# Altium PCB project.PcbDoc
Units mil, origin at the board's own origin, x right, y up, seen from the top; angles counter-clockwise.
Board outline 2319.86 x 2319.86 mil, 2 copper layers (Top Layer, Bottom Layer); 78 components, 50 nets, 256 pads, 0 vias.
Unrouted connection lines stored in the file: 1.
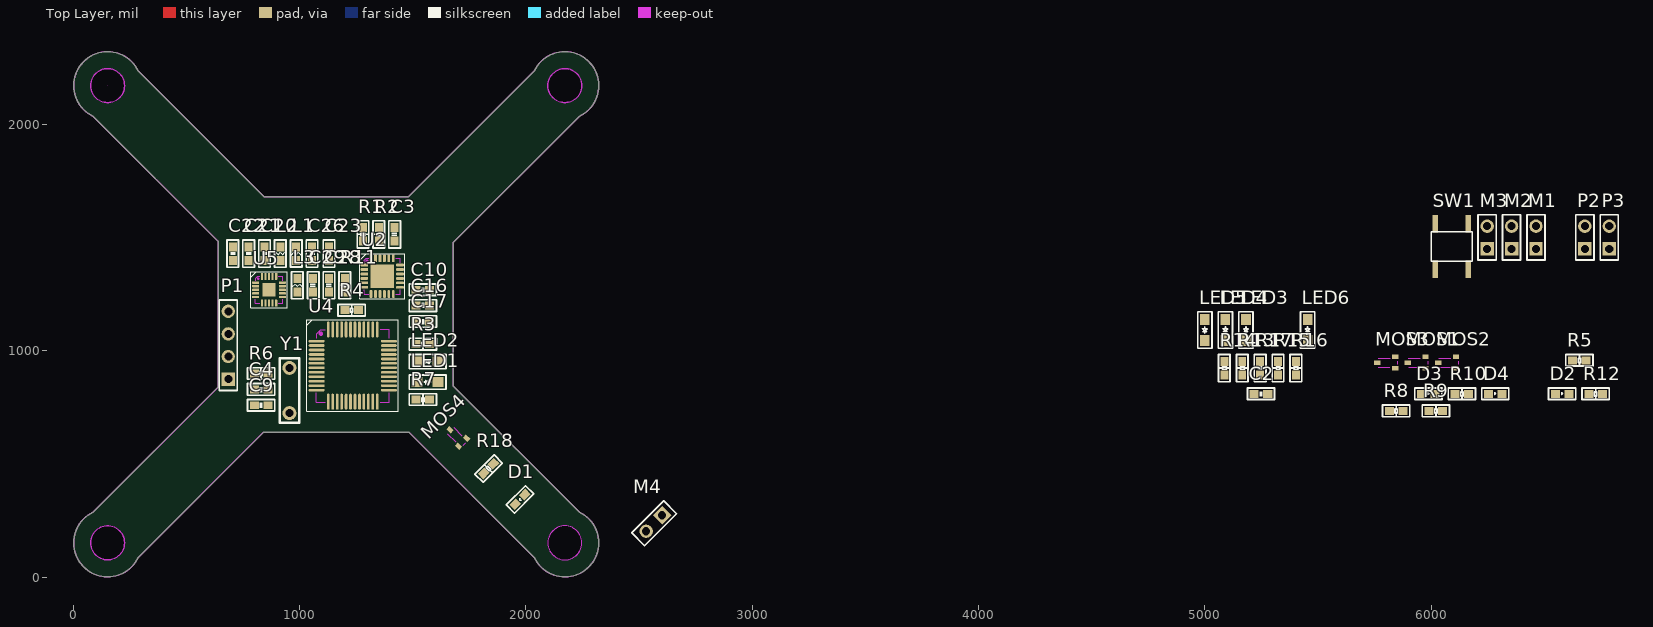
[diagram p0: Top Layer view]
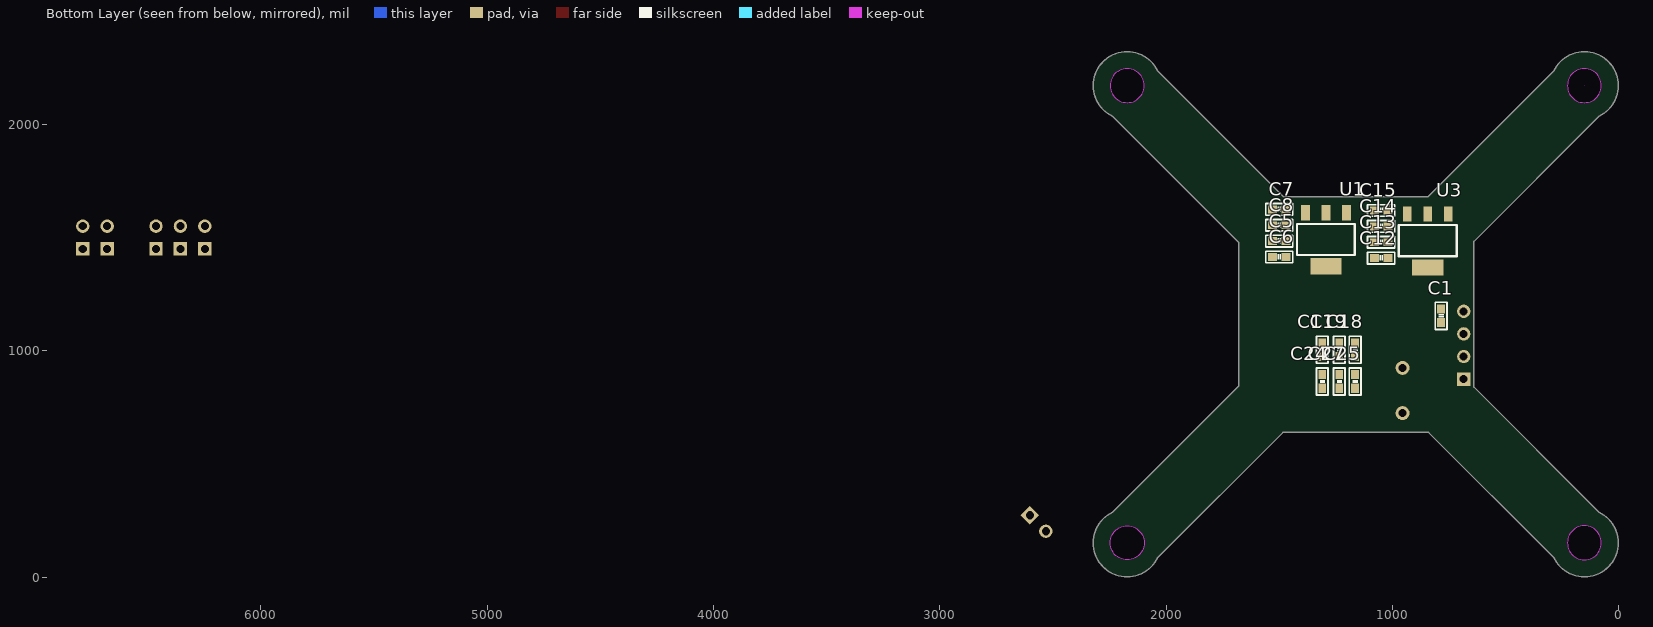
[diagram p1: Bottom Layer view, seen from below]

## Layer stack, top to bottom
Top Solder: solder mask 0.4, Solder Resist, Dk 3.5
Top Layer: signal copper 1.4
Dielectric 1: dielectric 12.6, FR-4, Dk 4.8
Bottom Layer: signal copper 1.4
Bottom Solder: solder mask 0.4, Solder Resist, Dk 3.5

## Board outline
287.32,87.32 cw(c151.97,151.97) 87.32,287.32 86.97,286.97 640,840 640,1483.94 86.97,2036.97 87.32,2036.61 cw(c151.97,2171.97) 287.32,2236.61 286.97,2236.97 843.94,1680 1480,1680 2036.97,2236.97 2036.61,2236.61 cw(c2171.97,2171.97) 2236.61,2036.61 2236.97,2036.97 1680,1480 1680,843.94 2236.97,286.97 2236.61,287.32 cw(c2171.97,151.97) 2036.61,87.32 2036.97,86.97 1483.94,640 840,640
cut-out: 2171.97,2096.97 cw(c2171.97,2171.97) 2096.97,2171.97 cw(c2171.97,2171.97) 2171.97,2246.97 cw(c2171.97,2171.97) 2246.97,2171.97 cw(c2171.97,2171.97)
cut-out: 2096.97,151.97 ccw(c2171.97,151.97) 2171.97,76.97 ccw(c2171.97,151.97) 2246.97,151.97 ccw(c2171.97,151.97) 2171.97,226.97 ccw(c2171.97,151.97)
cut-out: 76.97,151.97 cw(c151.97,151.97) 151.97,226.97 cw(c151.97,151.97) 226.97,151.97 cw(c151.97,151.97) 151.97,76.97 cw(c151.97,151.97)
cut-out: 151.97,2096.97 cw(c151.97,2171.97) 76.97,2171.97 cw(c151.97,2171.97) 151.97,2246.97 cw(c151.97,2171.97) 226.97,2171.97 cw(c151.97,2171.97)
cut-out: 151.97,2171.97

## Design rules (kind name [scope] priority, off if disabled: settings)
Clearance [All] p1: gap=1 ignorepadtopadclearanceinfootprint=FALSE except(0: Arc-Hole Track-Hole SMDPad-Hole THPad-Hole Via-Hole Fill-Hole Poly-Hole Region-Hole Text-Hole)
ComponentClearance [All] p1: gap=10 collisioncheckmode=3 verticalgap=100000 showdistances=FALSE
PolygonConnect [All] p1: connectstyle=Relief reliefconductorwidth=10 reliefentries=4 polygonreliefangle="90 Angle" airgapwidth=10
RoutingVias [All] p1: holewidth=28 width=50 viastyle="Through Hole" minholewidth=28 minwidth=50 maxholewidth=28 maxwidth=50
SolderMaskExpansion [All] p1: expansion=4
Width [All] p1: maxlimit=10 minlimit=10 preferedwidth=10
29 further rules are at their usual default settings.

## Components (designator, comment, footprint, x,y, rotation, side; value= is the part's Value field where it differs from the comment)
C1 "104" C0603 785,1155 r90 bottom
C2 "105" C0603 5247.56,810.37 r0 top value=104
C3 "2.2n" C0603 1420,1515 r270 top value=104
C4 "20p" C0603 830,830 r0 top value=104
C5 "22u" C0603 1500,1485 r0 bottom
C6 "100n" C0603 1500,1415 r0 bottom
C7 "10u" C0603 1500,1625 r0 bottom
C8 "100n" C0603 1500,1555 r0 bottom
C9 "20p" C0603 830,760 r0 top value=104
C10 "104" C0603 1545,1270 r0 top
C11 "0.1U" C0603 1310,1005 r270 bottom value=104
C12 "22u" C0603 1049.92,1410 r0 bottom
C13 "100n" C0603 1049.92,1480 r0 bottom
C14 "10u" C0603 1049.92,1550 r0 bottom
C15 "100n" C0603 1049.92,1620 r0 bottom
C16 "0.1u" C0603 1545,1200 r180 top value=104
C17 "104" C0603 1545,1130 r0 top
C18 "0.1u" C0603 1165,1005 r90 bottom value=104
C19 "0.1u" C0603 1235,1005 r90 bottom value=104
C20 "33n" C0603 845,1430 r90 top value=104
C21 "10n" C0603 775,1430 r90 top value=104
C22 "1n" C0603 705,1430 r90 top value=104
C23 "1p" C0603 1130,1430 r90 top value=104
C24 "0.1u" C0603 1310,865 r90 bottom value=104
C25 "10u" C0603 1165,865 r90 bottom value=104
C26 "1.5p" C0603 1055,1430 r90 top value=104
C27 "0.1u" C0603 1235,865 r90 bottom value=104
C28 "2.2n" C0603 1130,1290 r270 top value=104
C29 "4.7p" C0603 1060,1290 r270 top value=104
D1 "SS14" D0603 1970.25,354.39 r225 top
D2 "SS14" D0603 6573.57,800.37 r0 top
D3 "SS14" D0603 5982.08,800.37 r0 top
D4 "SS14" D0603 6277.83,800.37 r0 top
L1 "3.9n" L0603 -2660,-7560 r270 top
L2 "8.2n" L0603 4560,10420 r90 top
L3 "2.7n" L0603 -2655,-7700 r270 top
LED1 "LED" LED 1565.64,862.17 r0 top
LED2 "LED" LED 1565.64,953.03 r0 top
LED3 "LED" LED 5181.1,1092.42 r90 top
LED4 "LED" LED 5090.24,1092.42 r90 top
LED5 "LED" LED 4999.37,1092.42 r90 top
LED6 "LED" LED 5453.7,1092.42 r90 top
M1 "TL" HDR-1X2 6457.68,1501.06 r90 top
M2 "TR" HDR-1X2 6349.8,1501.06 r90 top
M3 "BL" HDR-1X2 6241.93,1501.06 r90 top
M4 "BR" HDR-1X2 2570,235 r225 top
MOS1 "AO3400" SOT-23 5933.35,947.34 r90 top
MOS2 "AO3400" SOT-23 6067.65,947.34 r90 top
MOS3 "AO3400" SOT-23 5799.05,947.34 r90 top
MOS4 "AO3400" SOT-23 1690,625 r45 top
P1 "SWD" HDR1X4 685,875 r90 top
P2 "Header-1X2" HDR-1X2 6673.43,1501.06 r90 top
P3 "Header-1X2" HDR-1X2 6781.3,1501.06 r90 top
R1 "10K" R0603 1280,1515 r90 top
R2 "10K" R0603 1350,1515 r90 top
R3 "510R" R0603 1545,1030 r0 top
R4 "10K" R0603 1229.92,1180 r0 top
R5 "10K,0603" R0603 6654.43,958.24 r0 top
R6 "1M" R0603 830,900 r180 top
R7 "510R" R0603 1545,785 r0 top
R8 "10K" R0603 5845,735 r0 top
R9 "10K" R0603 6020,735 r0 top
R10 "10K" R0603 6134.87,810.37 r0 top
R11 "22k" R0603 1200,1290 r270 top
R12 "10K" R0603 6726.37,810.37 r0 top
R13 "10K" R0603 5164.8,923.9 r90 top
R14 "10K" R0603 5085.75,923.9 r90 top
R15 "10K" R0603 5322.91,923.9 r90 top
R16 "10K" R0603 5401.97,923.9 r90 top
R17 "10K" R0603 5243.86,923.9 r90 top
R18 "10K" R0603 1835,480 r225 top
SW1 "SW-PB_V" KEY-SMT 6089.99,1461.24 r90 top
U1 "AMS1117-5" SOT-223-L 1295,1490 r0 bottom
U2 "MPU6050" QFN-24-4X4-L 1365,1330 r0 top
U3 "AMS1117-3.3" SOT-223-L 845,1485 r0 bottom
U4 "STM32F103C8T6" LQFP-48-5X5 1235,935 r0 top
U5 "nRF24L01" QFN-20-3X3-L 865,1270 r0 top
Y1 "16MHz" XTAL1 955,725 r90 top

## Footprints (in the part's own frame and the unit in brackets; to place one, negate y for a bottom-side part, rotate by r counter-clockwise, add the part's x,y. Pads: shape width x height; smd on the part's side, far side on the other; paste and mask are expansions set on the pad)
C0603 [mil]
  rect 40x35 smd: 1(-29.92,0) 2(29.92,0)
  silkscreen extent -60,-26 60,26
D0603 [mil]
  rect 40x35 smd: 1(-25,10) 2(34.84,10)
  silkscreen extent -55,-16 65,36
HDR1X4 [mm] "Connector; Header; 4 Position; Right Angle"
  rect 1.5x1.5 hole 0.9: 1(0,0)
  round 1.5 hole 0.9: 2(2.54,0) 3(5.08,0) 4(7.62,0)
  silkscreen extent -1.27,-1.02 8.89,1.02
HDR-1X2 [mm]
  rect 1.5x1.5 hole 0.9: 1(-1.27,-0.127)
  round 1.5 hole 0.9: 2(1.27,-0.127)
  silkscreen extent -2.54,-1.14 2.54,0.89
KEY-SMT [mm]
  rect 2x0.6 smd: 1(-2.55,-1.85) 1(2.55,-1.87) 2(-2.55,1.85) 2(2.55,1.85)
  silkscreen extent -1.65,-2.29 1.65,2.29
L0603 [mil]
  rect 40x35 smd: 1(-9020,3645) 2(-8960.16,3645)
  silkscreen extent -9050,3619 -8930,3671
LED [mil]
  rect 49x43 smd: 1(46.26,0) 2(-46.26,0)
  silkscreen extent -81,-31 81,31
LQFP-48-5X5 [mm]
  oval 1.8x0.3 smd: 1(-4.05,2.75) 2(-4.05,2.25) 3(-4.05,1.75) 4(-4.05,1.25) 5(-4.05,0.75) 6(-4.05,0.25) 7(-4.05,-0.25) 8(-4.05,-0.75) 9(-4.05,-1.25) 10(-4.05,-1.75) 11(-4.05,-2.25) 12(-4.05,-2.75) 25(4.05,-2.75) 26(4.05,-2.25) 27(4.05,-1.75) 28(4.05,-1.25) 29(4.05,-0.75) 30(4.05,-0.25) 31(4.05,0.25) 32(4.05,0.75) 33(4.05,1.25) 34(4.05,1.75) 35(4.05,2.25) 36(4.05,2.75)
  oval 0.3x1.8 smd: 13(-2.75,-4.05) 14(-2.25,-4.05) 15(-1.75,-4.05) 16(-1.25,-4.05) 17(-0.75,-4.05) 18(-0.25,-4.05) 19(0.25,-4.05) 20(0.75,-4.05) 21(1.25,-4.05) 22(1.75,-4.05) 23(2.25,-4.05) 24(2.75,-4.05) 37(2.75,4.05) 38(2.25,4.05) 39(1.75,4.05) 40(1.25,4.05) 41(0.75,4.05) 42(0.25,4.05) 43(-0.25,4.05) 44(-0.75,4.05) 45(-1.25,4.05) 46(-1.75,4.05) 47(-2.25,4.05) 48(-2.75,4.05)
  Top Layer keep-out circle w0.254: c-3.581,3.581 r0.114
  Top Layer keep-out lines w0.1: -4.089,-3.073 -4.089,-4.089 -3.073,-4.089 ; -4.064,3.073 -4.064,3.556 -3.581,4.039 -3.34,4.039 -3.061,4.039 ; 3.073,-4.089 4.089,-4.089 4.089,-3.073 ; 3.073,4.089 4.089,4.089 4.089,3.073
  silkscreen extent -5.18,-5.13 5.13,5.13
QFN-20-3X3-L [mm]
  rrect50% 0.8x0.25 smd mask+0.064: 1(-1.5,0.8) 2(-1.5,0.4) 3(-1.5,0) 4(-1.5,-0.4) 5(-1.5,-0.8) 11(1.5,-0.8) 12(1.5,-0.4) 13(1.5,0) 14(1.5,0.4) 15(1.5,0.8)
  rrect50% 0.25x0.8 smd mask+0.064: 6(-0.8,-1.5) 7(-0.4,-1.5) 8(0,-1.5) 9(0.4,-1.5) 10(0.8,-1.5) 16(0.8,1.5) 17(0.4,1.5) 18(0,1.5) 19(-0.4,1.5) 20(-0.8,1.5)
  rect 1.5x1.5 smd: 21(0,0)
  Top Layer keep-out lines w0.1: -1.524,-1.041 -1.524,-1.524 -1.041,-1.524 ; -1.499,1.041 -1.499,1.283 -1.257,1.524 -1.041,1.524 ; 1.041,-1.524 1.524,-1.524 1.524,-1.041 ; 1.041,1.524 1.524,1.524 1.524,1.041
  Top Layer keep-out lines w0.254: -1.219,1.27 ccw(c-1.218,1.26) -1.217,1.249
  silkscreen extent -2.03,-2.03 2.03,2.03
QFN-24-4X4-L [mm]
  rrect50% 0.85x0.3 smd mask+0.064: 1(-2,1.25) 2(-2,0.75) 3(-2,0.25) 4(-2,-0.25) 5(-2,-0.75) 6(-2,-1.25) 13(2,-1.25) 14(2,-0.75) 15(2,-0.25) 16(2,0.25) 17(2,0.75) 18(2,1.25)
  rrect50% 0.3x0.85 smd mask+0.064: 7(-1.25,-2) 8(-0.75,-2) 9(-0.25,-2) 10(0.25,-2) 11(0.75,-2) 12(1.25,-2) 19(1.25,2) 20(0.75,2) 21(0.25,2) 22(-0.25,2) 23(-0.75,2) 24(-1.25,2)
  rect 2.6x2.6 smd: 25(0,0)
  Top Layer keep-out lines w0.1: -2.032,-1.524 -2.032,-2.032 -1.524,-2.032 ; -2.032,1.524 -2.032,1.778 -1.778,2.032 -1.524,2.032 ; 1.524,-2.032 2.032,-2.032 2.032,-1.524 ; 1.524,2.032 2.032,2.032 2.032,1.524
  Top Layer keep-out lines w0.254: -1.67,1.716 ccw(c-1.702,1.702) -1.668,1.709
  silkscreen extent -2.54,-2.54 2.54,2.54
R0603 [mil]
  rect 40x35 smd: 1(-29.92,0) 2(29.92,0)
  silkscreen extent -60,-26 60,26
SOT-23 [mm]
  rect 0.5x0.7 smd: 1(0.675,-1.051) 2(-0.625,-1.051) 3(0.025,0.949)
  Top Layer keep-out lines w0.1: 0.508,0.864 0.508,-0.483 ; -0.483,0.838 -0.483,-0.457 ; -0.152,-1.346 0.203,-1.346
SOT-223-L [mm]
  rect 1x1.7 smd: 1(-2.325,-3.051) 2(-0.025,-3.051) 3(2.275,-3.051)
  rect 3.5x1.8 smd: 2(-0.025,2.949)
  silkscreen extent -3.28,-1.8 3.22,1.7, body extent -3.28,-3.56 3.22,3.46, height 1.65
XTAL1 [mil]
  round 62 hole 35.43: 1(0,0) 2(200,0)
  silkscreen extent -43,-43 243,43

## Part data
C1 C2 C3 C4 C9 C10 C11 C16 C17 C18 C19 C20 C21 C22 C23 C24 C25 C26 C27 C28 C29: library part CAP, "Capacitor", LatestRevisionDate=17-Jul-2002, LatestRevisionNote="Re-released for DXP Platform.", Published=8-Jun-2000, Publisher="Altium Limited"
C5 C6 C7 C8 C12 C13 C14 C15: library part CAPP
D1 D2 D3 D4: library part Diode
L1 L2 L3: library part Inductance
M1 M2 M3 M4: library part Motor
P1: library part "Header 4", "Header, 4-Pin", LatestRevisionDate=17-Jul-2002, LatestRevisionNote="Re-released for DXP Platform.", Publisher="Altium Limited"
R1 R2 R3 R4 R5 R6 R7 R8 R9 R10 R11 R12 R13 R14 R15 R16 R17 R18: library part RES, "Resistor", LatestRevisionDate=17-Jul-2002, LatestRevisionNote="Re-released for DXP Platform.", Published=8-Jun-2000, Publisher="Altium Limited"
SW1: "SWITCH"
U1 U3: library part AMS1117
Y1: library part XTAL, "Crystal Oscillator", LatestRevisionDate=17-Jul-2002, LatestRevisionNote="Re-released for DXP Platform.", Published=8-Jun-2000, Publisher="Altium Limited"

## Nets (pads, with @x,y where several pads share a name; then routed paths per layer and width w, separated by ;. In a path a pad name is that pad's centre, name@x,y a point inside that pad or via, vN(x,y) a via of type N, cw(c..) or ccw(c..) an arc to the next point about the centre after c; other vN are vias at no path point)
ADC: U4.17
BOOT0: R4.1 U4.44
GND: C1.1 C3.1 C4.1 C5.2 C6.2 C7.2 C8.2 C9.1 C10.2 C11.2 C12.2 C13.2 C14.2 C15.2 C16.1 C17.2 C18.1 C19.1 C20.2 C21.2 C22.2 C23.2 C24.1 C25.1 C27.1 C28.1 C29.1 MOS1.2 MOS2.2 MOS3.2 MOS4.2 P1.1 P3.2 R3.2 R4.2 R5.1 R7.2 R9.2 R10.2 R11.2 R12.2 R13.2 R14.2 R15.2 R16.2 R17.2 R18.2 SW1.1 U1.1 U2.1 U2.9 U2.11 U2.18 U3.1 U4.8 U4.23 U4.35 U4.47 U5.8 U5.14 U5.17 U5.20
LED_BL: LED5.1 U4.21
LED_BR: LED6.1 U4.22
LED_TL: LED4.1 U4.41
LED_TR: LED3.1 U4.40
Motor_BL: MOS3.1 R17.1 U4.18
Motor_BR: MOS4.1 R18.1 U4.19
Motor_TL: MOS1.1 R15.1 U4.45
Motor_TR: MOS2.1 R16.1 U4.46
MPU6050_SCL: R2.1 U2.23 U4.16
MPU6050_SDA: R1.1 U2.24 U4.15
NetC3_2: C3.2 U2.20
NetC10_1: C10.1 U2.13
NetC17_1: C17.1 U2.10
NetC18_2: C18.2 U4.1
NetC20_1: C20.1 U5.19
NetC23_1: C23.1 C26.1 L1.2
NetC28_2: C28.2 C29.2 L3.2 U5.11
NetD1_1: D1.1 M4.1 MOS4.3
NetD2_1: D2.1 M1.1 MOS1.3
NetD3_1: D3.1 M2.1 MOS2.3
NetD4_1: D4.1 M3.1 MOS3.3
NetL1_1: L1.1 L2.2 U5.13
NetL2_1: L2.1 L3.1 U5.12
NetLED1_K: LED1.2 R3.1
NetLED2_K: LED2.2 R7.1
NetLED3_K: LED3.2 R10.1
NetLED4_K: LED4.2 R12.1
NetLED5_K: LED5.2 R13.1
NetLED6_K: LED6.2 R14.1
NetR8_2: R8.2 R9.1
NetR11_1: R11.1 U5.16
nRF24L01_CE: U4.14 U5.1
nRF24L01_CSN: U4.12 U5.3
nRF24L01_MISO: U4.10 U5.5
nRF24L01_MOSI: U4.11 U5.4
nRF24L01_SCK: U4.13 U5.2
OSCI: C4.2 R6.2 U4.5 U5.10 Y1.2
OSCO: C9.2 R6.1 U4.6 U5.9 Y1.1
PWR_LED: LED2.1 U4.4
RESET: C2.1 R5.2 U4.7
Serial_Rx: P2.2 U4.31
Serial_Tx: P2.1 U4.30
SWDCLK: P1.3 U4.37
SWDIO: P1.2 U4.34
VCC: C7.1 C8.1 C14.1 C15.1 P3.1 R8.1 U1.3 U3.3
VCC_3.3: C1.2 C2.2 C11.1 C12.1 C13.1 C16.2 C19.2 C21.1 C22.1 C24.2 C25.2 C27.2 LED1.1 P1.4 R1.2 R2.2 SW1.2 U2.8 U3.2 U4.9 U4.24 U4.36 U4.48 U5.7 U5.15
VCC_5: C5.1 C6.1 D1.2 D2.2 D3.2 D4.2 M1.2 M2.2 M3.2 M4.2 U1.2
pads on no net: C26.2 U2.2 U2.3 U2.4 U2.5 U2.6 U2.7 U2.12 U2.14 U2.15 U2.16 U2.17 U2.19 U2.21 U2.22 U2.25 U4.2 U4.3 U4.20 U4.25 U4.26 U4.27 U4.28 U4.29 U4.32 U4.33 U4.38 U4.39 U4.42 U4.43 U5.6 U5.18 U5.21

## Keep-outs
Top Layer:
  circle w3.94: c151.97,151.97 r75
  circle w3.94: c2171.97,151.97 r75
  circle w3.94: c2171.97,2171.97 r75
  circle w3.94: c151.97,2171.97 r75
  lines w3.94: 86.97,286.97 640,840 640,1483.94 86.97,2036.97 ; 87.32,287.32 ccw(c151.97,151.97) 287.32,87.32 ; 87.32,2036.61 cw(c151.97,2171.97) 287.32,2236.61 ; 286.97,86.97 840,640 1483.94,640 2036.97,86.97 ; 286.97,2236.97 843.94,1680 1480,1680 2036.97,2236.97 ; 2036.61,87.32 ccw(c2171.97,151.97) 2236.61,287.32 ; 2036.61,2236.61 cw(c2171.97,2171.97) 2236.61,2036.61 ; 2236.97,286.97 1680,843.94 1680,1480 2236.97,2036.97

## Other copper
Top Layer:
  pour cut-out: 151.97,2096.97 cw(c151.97,2171.97) 76.97,2171.97 cw(c151.97,2171.97) 151.97,2246.97 cw(c151.97,2171.97) 226.97,2171.97 cw(c151.97,2171.97)